# EAGLE board 06_SHL_New (EAGLE 7.5.0)
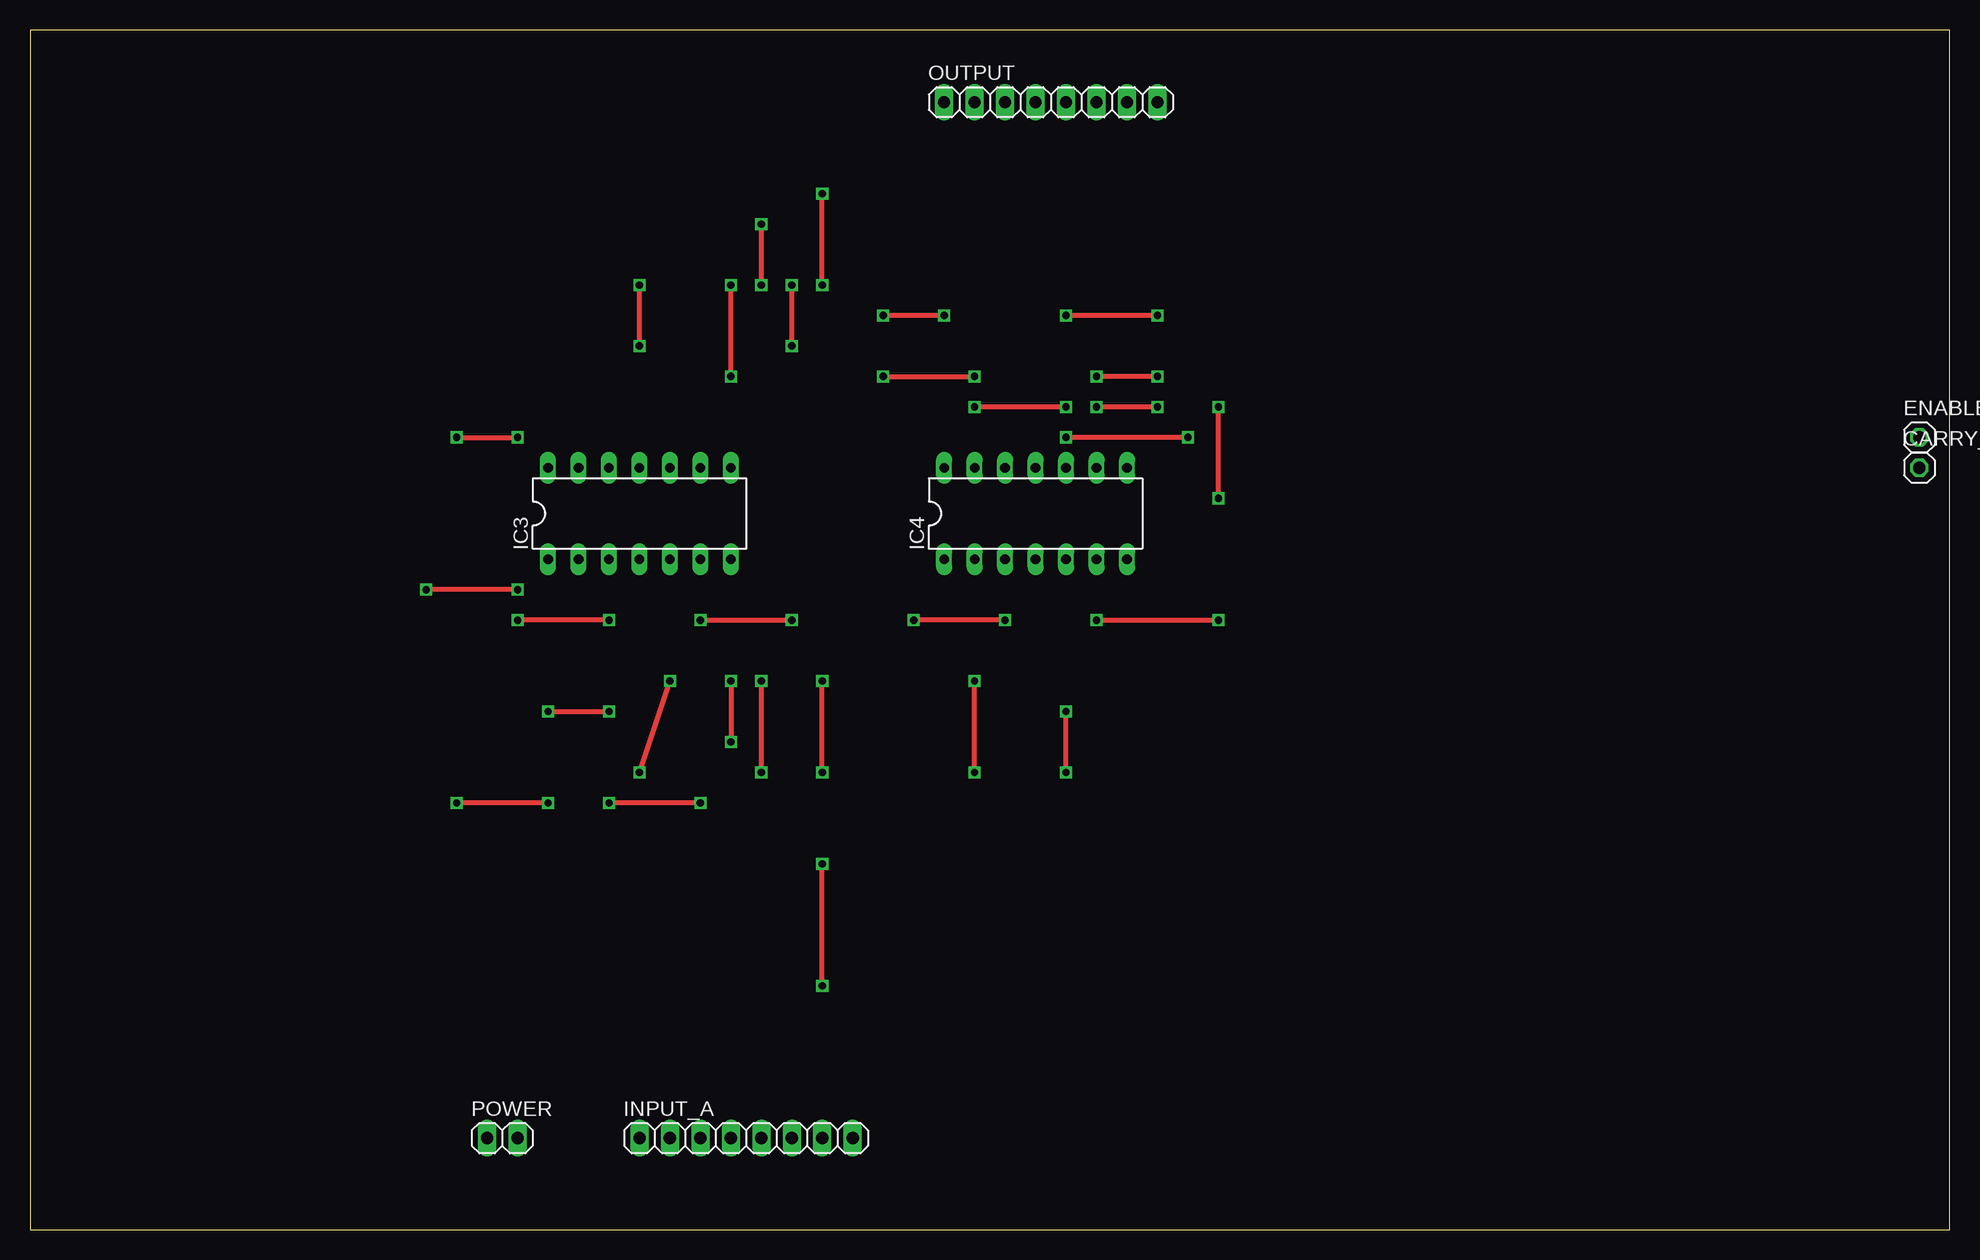
[diagram p0: board, top side]
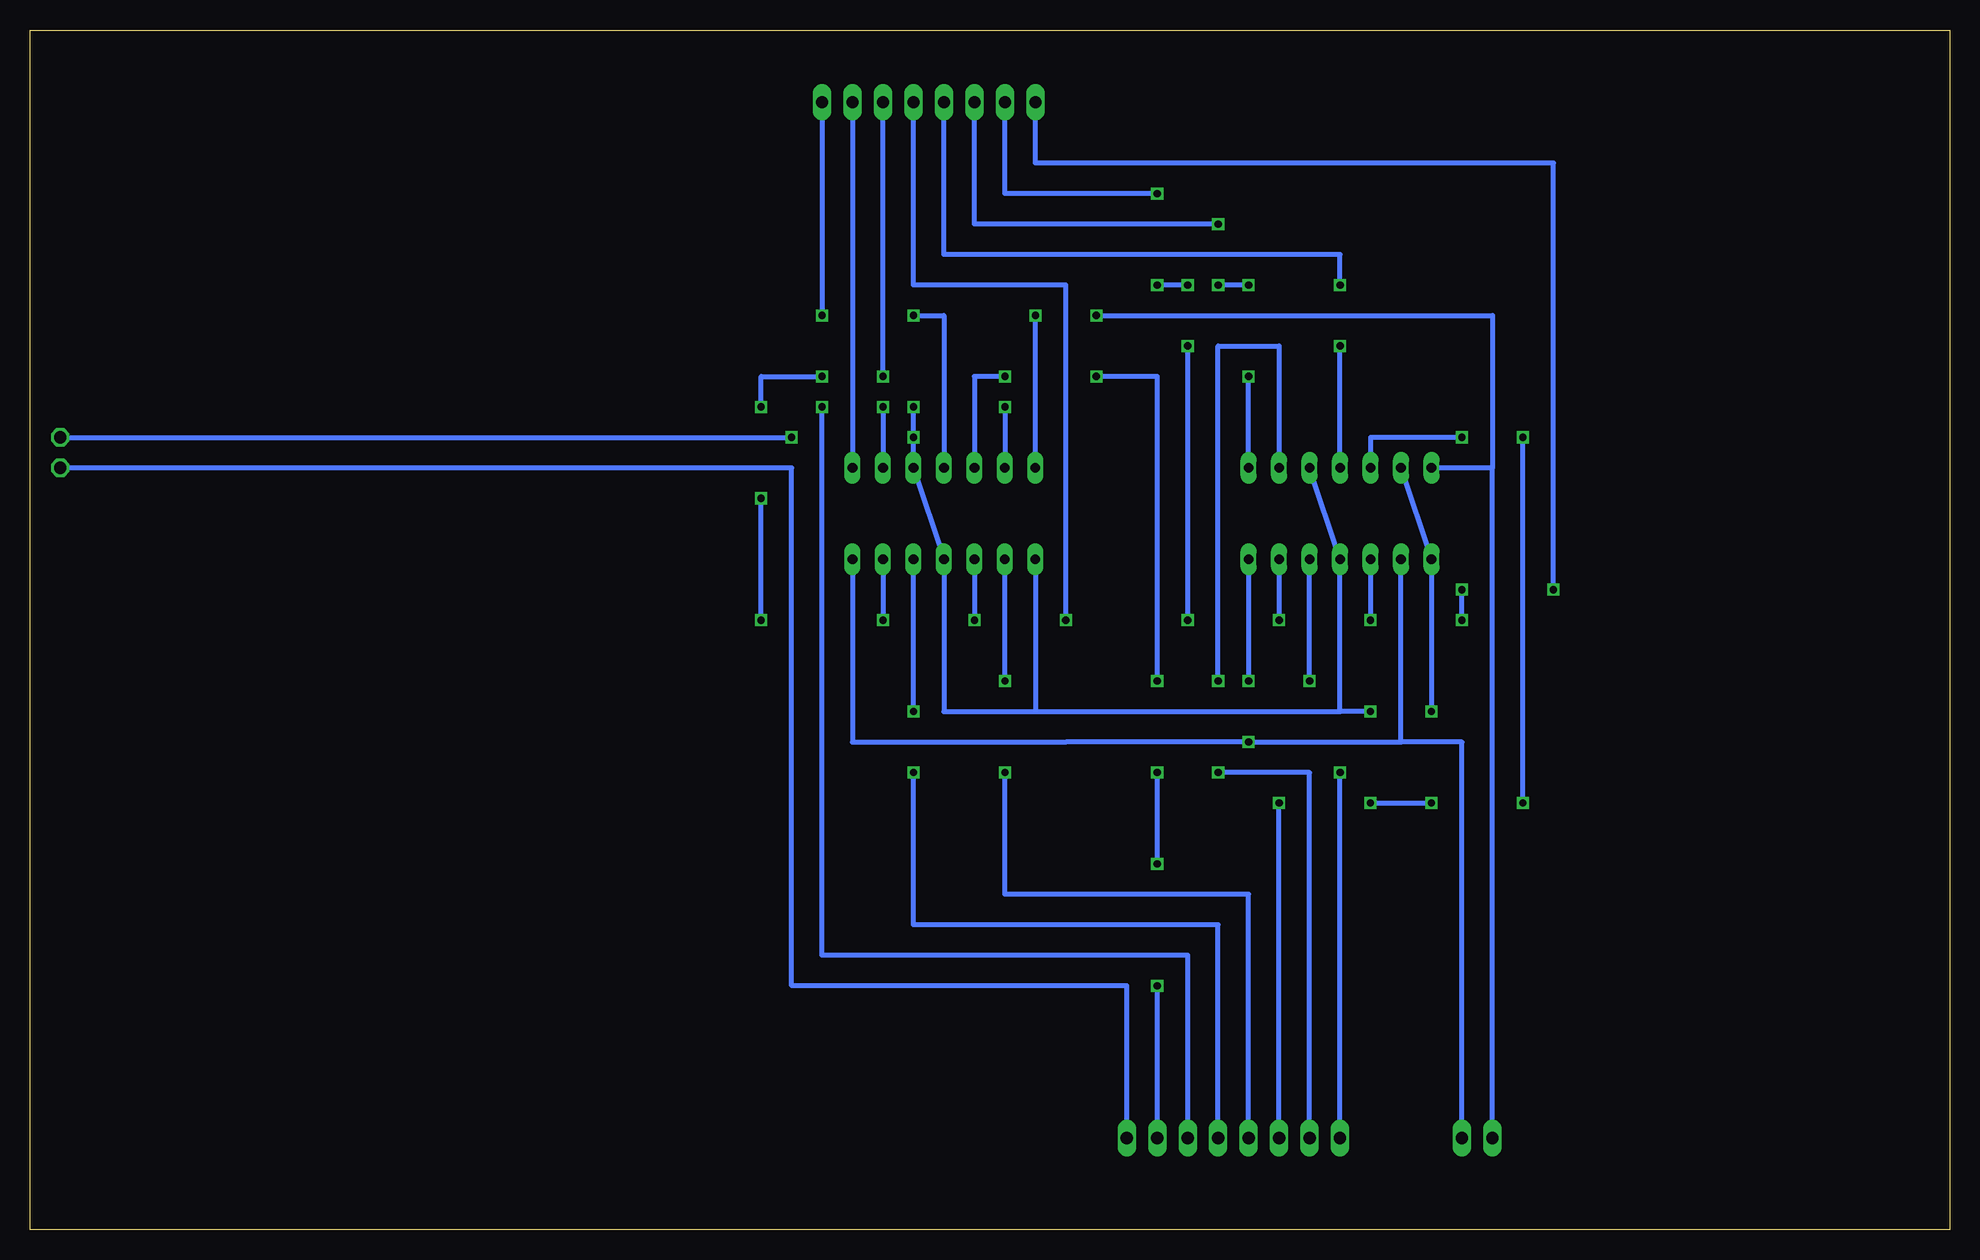
[diagram p1: board, bottom side, seen from below]

Size 160 x 100 mm. Coordinates in mm from the lower left corner, seen from the top.
Outline: 0,0 160,0 160,100 0,100 0,0
Copper layers (1*16): Top 0.035mm / dielectric 1.5mm / Bottom 0.035mm
Design rules "default": minimum track width 10mil, minimum drill 24mil, track to track 8mil, track to pad 8mil, pad to pad 8mil, via to via 8mil, smd to smd 8mil, copper to edge 40mil, drill to drill 8mil, minimum pad ring 10mil, minimum via ring 8mil, stop-mask expansion 4mil, vias tented up to drill 0mil, thermal gap 10mil

## Footprints (pad centres in the part's own frame; a part is rotated, then mirrored left to right if it is on the bottom)
1X01 = drill 1.016 octagon: 1 0,0
DIL14 = drill 0.813 long: 1 -7.62,-3.81; 2 -5.08,-3.81; 3 -2.54,-3.81; 4 0,-3.81; 5 2.54,-3.81; 6 5.08,-3.81; 7 7.62,-3.81; 8 7.62,3.81; 9 5.08,3.81; 10 2.54,3.81; 11 0,3.81; 12 -2.54,3.81; 13 -5.08,3.81; 14 -7.62,3.81
1X08 = drill 1.016 long: 1 -8.89,0; 2 -6.35,0; 3 -3.81,0; 4 -1.27,0; 5 1.27,0; 6 3.81,0; 7 6.35,0; 8 8.89,0
1X02 = drill 1.016 long: 1 -1.27,0; 2 1.27,0

## Placement (x,y rotation side)
CARRY_OUT  [1X01]  157.48,63.5 0 top
ENABLE  [1X01]  157.48,66.04 0 top
IC3  74LS126N  [DIL14]  50.8,59.69 0 top
IC4  74LS126N  [DIL14]  83.82,59.69 0 top
INPUT_A  [1X08]  59.69,7.62 0 top
OUTPUT  [1X08]  85.09,93.98 0 top
POWER  [1X02]  39.37,7.62 0 top

## Library data of the parts
CARRY_OUT ENABLE INPUT_A OUTPUT POWER = pinhead
IC3 IC4 = 74xx-eu

## Nets
GND: IC3.2 IC3.7 IC4.7 POWER.2
N$1: IC3.5 INPUT_A.1
N$2: CARRY_OUT.1 INPUT_A.8
N$3: IC3.9 INPUT_A.2
N$9: IC4.5 INPUT_A.5
N$11: IC4.9 INPUT_A.6
N$13: IC4.12 INPUT_A.7
N$20: IC3.12 INPUT_A.3
N$21: IC4.2 INPUT_A.4
N$25: IC3.3 OUTPUT.1
N$26: IC3.6 OUTPUT.2
N$27: IC3.8 OUTPUT.3
N$28: IC3.11 OUTPUT.4
N$29: IC4.3 OUTPUT.5
N$30: IC4.6 OUTPUT.6
N$31: IC4.8 OUTPUT.7
N$32: IC4.11 OUTPUT.8
N$33: ENABLE.1 IC3.1 IC3.4 IC3.10 IC3.13 IC4.1 IC4.4 IC4.10 IC4.13
VCC: IC3.14 IC4.14 POWER.1

## Tracks (layer width: path | path; a pad name or v marks a point on that pad's centre or on a via)
GND  (via drill 0.6)
  Top 0.406: v58.42,45.72 v58.42,40.64
  Bottom 0.406: POWER.2 40.64,40.64 45.72,40.64 | 45.72,40.64 IC3.2 | IC4.7 91.44,40.64 73.66,40.64 v58.42,40.64 45.72,40.64 | IC3.7 v58.42,45.72
N$1  (via drill 0.6)
  Top 0.406: v50.8,38.1 v53.34,45.72
  Bottom 0.406: INPUT_A.1 v50.8,38.1 | v53.34,45.72 IC3.5
N$2
  Bottom 0.406: INPUT_A.8 68.58,20.32 96.52,20.32 96.52,63.5 CARRY_OUT.1
N$3  (via drill 0.6)
  Top 0.406: v60.96,38.1 v60.96,45.72
  Bottom 0.406: INPUT_A.2 53.34,38.1 v60.96,38.1 | v60.96,45.72 60.96,73.66 55.88,73.66 IC3.9
N$9  (via drill 0.6)
  Top 0.406: v86.36,38.1 v86.36,43.18
  Bottom 0.406: INPUT_A.5 60.96,25.4 86.36,25.4 v86.36,38.1 | v86.36,43.18 IC4.5
N$11  (via drill 0.6)
  Top 0.406: v93.98,68.58 v88.9,68.58
  Bottom 0.406: INPUT_A.6 63.5,22.86 93.98,22.86 v93.98,68.58 | v88.9,68.58 IC4.9
N$13  (via drill 0.6)
  Top 0.406: v66.04,20.32 v66.04,30.48 | v66.04,38.1 v66.04,45.72 | v71.12,71.12 v78.74,71.12
  Bottom 0.406: INPUT_A.7 v66.04,20.32 | v66.04,30.48 v66.04,38.1 | v66.04,45.72 66.04,71.12 v71.12,71.12 | v78.74,71.12 81.28,71.12 IC4.12
N$20  (via drill 0.6)
  Top 0.406: v55.88,35.56 v48.26,35.56 | v43.18,35.56 v35.56,35.56 | v35.56,66.04 v40.64,66.04
  Bottom 0.406: INPUT_A.3 v55.88,35.56 | v48.26,35.56 v43.18,35.56 | v35.56,35.56 v35.56,66.04 | v40.64,66.04 48.26,66.04 IC3.12
N$21  (via drill 0.6)
  Top 0.406: v78.74,38.1 v78.74,45.72
  Bottom 0.406: INPUT_A.4 58.42,27.94 78.74,27.94 v78.74,38.1 | v78.74,45.72 IC4.2
N$25  (via drill 0.6)
  Top 0.406: v48.26,50.8 v40.64,50.8 | v40.64,53.34 v33.02,53.34
  Bottom 0.406: IC3.3 v48.26,50.8 | v40.64,50.8 v40.64,53.34 | v33.02,53.34 33.02,88.9 76.2,88.9 OUTPUT.1
N$26  (via drill 0.6)
  Top 0.406: v55.88,50.8 v63.5,50.8 | v63.5,73.66 v63.5,78.74 | v66.04,78.74 v66.04,86.36
  Bottom 0.406: IC3.6 v55.88,50.8 | v63.5,50.8 v63.5,73.66 | v63.5,78.74 v66.04,78.74 | v66.04,86.36 78.74,86.36 OUTPUT.2
N$27  (via drill 0.6)
  Top 0.406: v58.42,71.12 v58.42,78.74 | v60.96,78.74 v60.96,83.82
  Bottom 0.406: IC3.8 v58.42,71.12 | v58.42,78.74 v60.96,78.74 | v60.96,83.82 81.28,83.82 OUTPUT.3
N$28  (via drill 0.6)
  Top 0.406: v50.8,73.66 v50.8,78.74
  Bottom 0.406: IC3.11 v50.8,73.66 | v50.8,78.74 50.8,81.28 83.82,81.28 OUTPUT.4
N$29  (via drill 0.6)
  Top 0.406: v81.28,50.8 v73.66,50.8
  Bottom 0.406: IC4.3 v81.28,50.8 | v73.66,50.8 73.66,78.74 86.36,78.74 OUTPUT.5
N$30  (via drill 0.6)
  Top 0.406: v88.9,50.8 v99.06,50.8 | v99.06,60.96 v99.06,68.58 | v93.98,71.12 v88.9,71.12
  Bottom 0.406: IC4.6 v88.9,50.8 | v99.06,50.8 v99.06,60.96 | v99.06,68.58 99.06,71.12 v93.98,71.12 | v88.9,71.12 OUTPUT.6
N$31
  Bottom 0.406: OUTPUT.7 IC4.8
N$32  (via drill 0.6)
  Top 0.406: v93.98,76.2 v86.36,76.2
  Bottom 0.406: OUTPUT.8 v93.98,76.2 | v86.36,76.2 83.82,76.2 IC4.11
N$33  (via drill 0.6)
  Top 0.406: v43.18,43.18 v48.26,43.18 | v96.52,66.04 v86.36,66.04 | v86.36,68.58 v78.74,68.58
  Bottom 0.406: 76.2,43.18 83.82,43.18 IC4.4 IC4.10 v86.36,66.04 v86.36,68.58 | IC4.1 76.2,43.18 | 76.2,43.18 50.8,43.18 | 50.8,43.18 IC3.4 IC3.10 | v43.18,43.18 IC3.1 IC3.13 | v48.26,43.18 50.8,43.18 | ENABLE.1 v96.52,66.04 | v78.74,68.58 IC4.13
VCC  (via drill 0.6)
  Top 0.406: v76.2,76.2 v71.12,76.2
  Bottom 0.406: POWER.1 38.1,63.5 | 38.1,63.5 IC3.14 | IC4.14 v76.2,76.2 | 38.1,63.5 38.1,76.2 v71.12,76.2